# Altium PCB ZYNQ7020_AD9364_V2.PcbDoc (part 3 of 3)
Units mil, origin at the board's own origin, x right, y up, seen from the top; angles counter-clockwise.
Board outline 6000 x 4000 mil, 4 copper layers (Top Layer, Layer 1, Layer 2, Bottom Layer), stack 23.756 mil thick; 294 components, 275 nets, 1509 pads, 328 vias.
Unrouted connection lines stored in the file: 993.
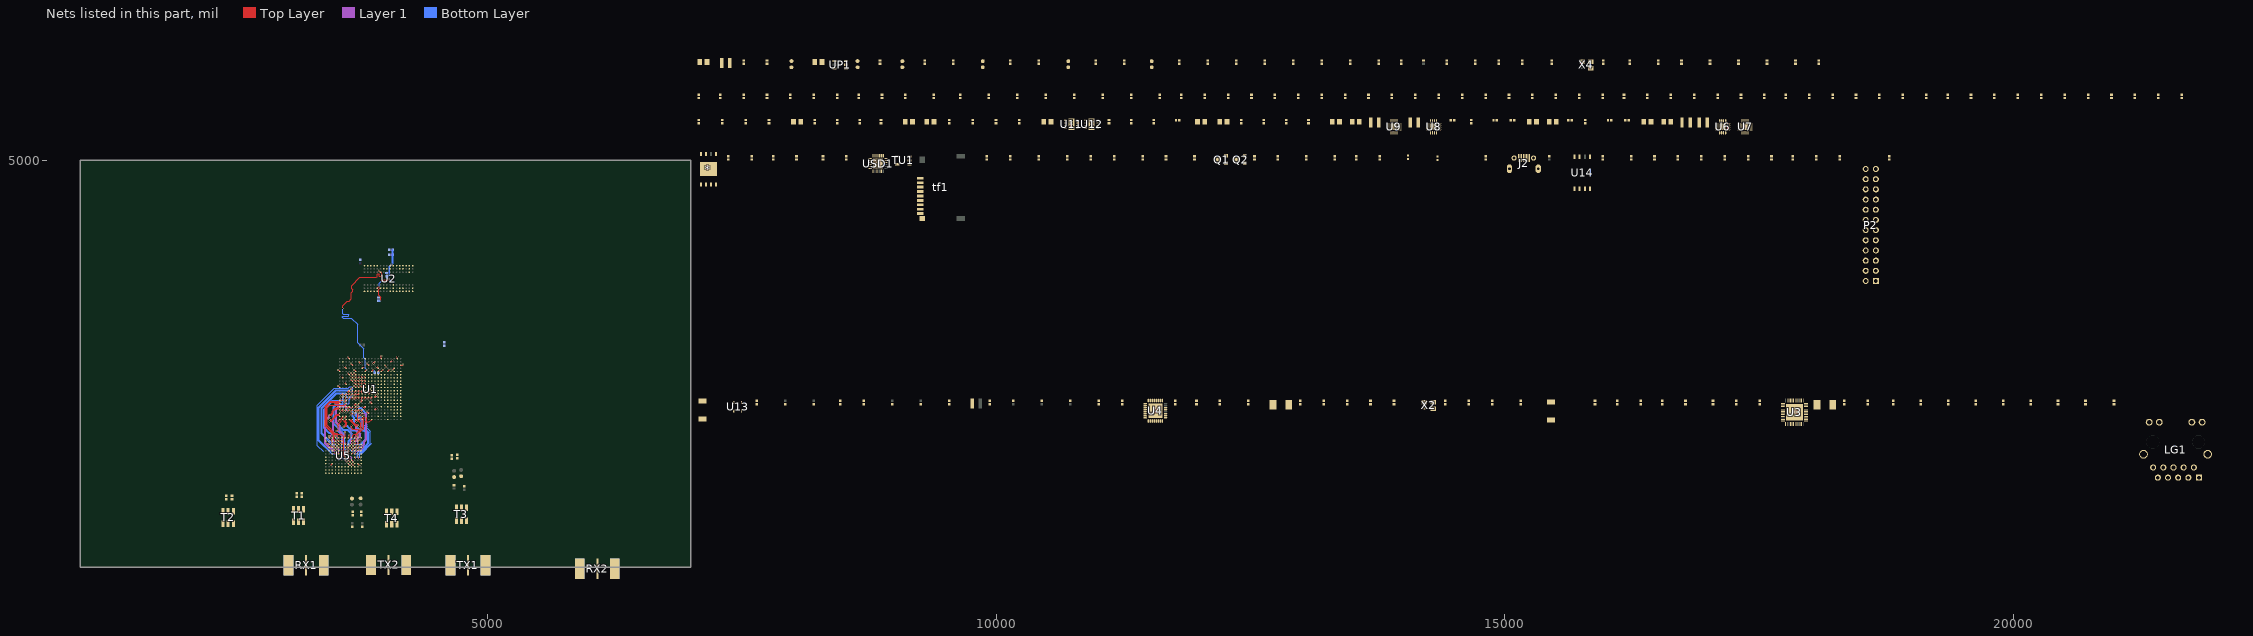
[diagram p4: the nets of this part, all layers, seen from the top]

## Via types
v1: diameter 17.72, hole 7.87, Top Layer to Bottom Layer, tented both sides, 194 vias
v2: diameter 16, hole 10, Top Layer to Bottom Layer, 118 vias
v3: diameter 19.68, hole 11.81, Top Layer to Bottom Layer, 16 vias

## Nets (pads, with @x,y where several pads share a name; then routed paths per layer and width w, separated by ;. In a path a pad name is that pad's centre, name@x,y a point inside that pad or via, vN(x,y) a via of type N, cw(c..) or ccw(c..) an arc to the next point about the centre after c; other vN are vias at no path point) (continued)
DDR3_VREF: C1.1 R4.1 R5.2 U1.H6 U1.P6 U2.H1 U2.M8 | length 538.6
  Top Layer w12: U2.M8@3920.99,3743.55 3920.99,3745.52 v2@3935.75,3760.28 ; U2.H1@4047,3965 v2(4062.72,3980.75)
  Top Layer w14: v2(3965.28,3820.32) 4017.44,3820.32 v2(4031.22,3834.1)
  Bottom Layer w12: v2(3938.7,3759.3) 3937.72,3760.28 3937.72,3790.79 v2@3966.26,3819.34
  Bottom Layer w14: 4051.89,3813.43 v2(4031.22,3834.1) 4011.54,3853.78 4036.14,3878.39 4036.14,3954.18 v2(4062.72,3980.75)
  Bottom Layer w20: C1.1@4010.02,3860.15 C1.1@4011,3859.17 ; v2(4062.72,3980.75) 4071.58,3989.61 4071.58,4074 R5.2@4071.58,4120
DDR3_WE: U1.M5 U2.L3 | length 1607.7
  Top Layer w6: v2(3580.33,3544.9) 3580.33,3570.49 3626.59,3616.75 3643.33,3616.75 3665.96,3639.39 3665.96,3699.43 3681.71,3715.18 3681.71,3728.96 3670.88,3739.79 3670.88,3770.3 3750.61,3850.02 3911.04,3850.02 3919.9,3858.88 3919.9,3879.55 3925.81,3885.45 3935.65,3885.45 3939.59,3881.52 3939.59,3863.8 3943.52,3859.86 3959.27,3859.86 3965.18,3865.77 3965.18,3891.36 3952.38,3904.16 3950.41,3904.16 v2(3936.63,3917.93) ; U1.M5@3801.92,2926.04 3803.84,2926.04 v2(3818.39,2940.6)
  Bottom Layer w6: v2@3581.32,3541.95 3581.32,3493.72 3586.24,3488.8 3637.42,3488.8 3642.34,3483.88 3642.34,3474.04 3637.42,3469.12 3581.32,3469.12 3577.38,3465.18 3577.38,3457.31 3585.25,3449.43 3666.95,3449.43 3726.99,3389.39 3726.99,3289 3726.86,3288.87 3726.86,3209.3 3786.9,3149.26 3786.9,3080.35 3786.65,3080.1 3786.65,3058.96 3803.63,3041.98 3803.63,3009.49 3803.38,3009.24 3803.38,2956.6 v2@3816.42,2943.55
EN_AGC: U1.W19 U5.G5 | length 541.8
  Top Layer w5: v1(3521.28,2341.28) 3523,2343 3525,2343 3536,2354 3536,2407 3567,2438 3567,2459 3582.88,2474.88 3582.88,2484.87 U1.W19@3583.06,2485.05 ; U5.G5@3604.5,2052.53 v1(3620.25,2036.78)
  Bottom Layer w5: v1(3521.28,2341.28) 3521.79,2341.79 3525.93,2341.79 3573,2294.72 3573,2084.03 v1(3620.25,2036.78)
ENABLE: U1.V15 U5.G6 | length 794.8
  Top Layer w5: U5.G6@3604.5,2084.02 3603.98,2084.02 3589,2099 3589,2288 3568.5,2308.5 3532.33,2308.5 3522.92,2317.92 3505.08,2317.92 3427,2396 3427,2568 3452,2593 3596.52,2593 U1.V15@3614.56,2611.04
ETH_MDC: U1.C10 U3.30
ETH_MDIO: R34.2 U1.C11 U3.31
ETH_RXCK: U1.B17 U3.19
ETH_RXCTL: R36.2 U1.D13 U3.13
ETH_RXD0: R41.1 U1.D11 U3.14
ETH_RXD1: R39.1 U1.A16 U3.16
ETH_RXD2: R43.1 U1.F15 U3.17
ETH_RXD3: R45.1 U1.A15 U3.18
ETH_TXCK: U1.A19 U3.22
ETH_TXCTL: U1.F14 U3.27
ETH_TXD0: U1.E14 U3.23
ETH_TXD1: U1.B18 U3.24
ETH_TXD2: U1.D10 U3.25
ETH_TXD3: U1.A17 U3.26
FB_CLK_N: RX22.2 U1.U17 U5.G10 | length 583.9
  Top Layer w5: U5.G10@3604.5,2210.01 v1(3620.25,2225.76) ; v1(3631.11,2532.64) 3631.11,2532.87 3646.59,2548.35 U1.U17@3646.59,2548.4
  Layer 1 w5: v1(3620.25,2225.76) 3598.09,2225.76 3593.76,2230.09 3593.76,2264.5 3588.26,2270 3588.26,2304.44 3556.07,2336.63 3556.07,2371.34 3556.07,2393 3521.26,2427.81 3521.26,2555.26 3549,2583 3604.28,2583 3615.22,2572.07 3615.22,2548.53 v1(3631.11,2532.64)
FB_CLK_P: U1.T16 U5.F10 | length 608.9
  Top Layer w5: v1(3557.36,2225.73) U5.F10@3573,2210.01 U5.F10@3573,2210.01 ; v1@3662.6,2564.38 U1.T16@3678.08,2579.87
  Layer 1 w5: v1(3557.36,2225.73) 3579.4,2225.73 3583.76,2230.09 3583.76,2260.36 3578.26,2265.86 3578.26,2300.3 3546.07,2332.49 3546.07,2388.86 3511.26,2423.67 3511.26,2559.4 3544.86,2593 3608.43,2593 3622.71,2578.72 3648.06,2578.72 v1(3662.6,2564.18)
FPGA_DONE: Q1.1 U1.R11 | length 21.9
  Top Layer w5: v1@3693.57,2721.54 U1.R11@3709.05,2737.02
  other v1: 3693.57,2721.36
FPGA_TCK: P2.10 U1.F9
FPGA_TDI: P2.8 U1.G6
FPGA_TDO: P2.7 U1.F6
FPGA_TMS: P2.9 U1.J6
GND: *.4 *.9 C1.2 C2.1 C3.1 C4.1 C5.1 C6.1 C7.1 C8.1 C9.1 C10.1 C11.1 C12.1 C13.1 C33.1 C34.1 C35.1 C36.1 C37.1 C38.1 C39.1 C41.1 C42.1 C43.1 C44.1 C45.1 C46.1 C49.1 C50.1 C51.1 C52.1 C53.1 C54.1 C55.1 C56.1 C57.1 C61.1 C62.1 C67.1 C68.1 C69.1 C70.1 C71.1 C72.1 C73.1 C74.1 C75.1 C76.1 C77.1 C78.1 C80.1 C81.2 C82.1 C83.1 C84.1 C85.1 C86.1 C87.1 C89.1 C90.1 C91.1 C92.1 C93.1 C94.1 C95.1 C96.1 C98.2 C99.2 C100.2 C101.2 C102.2 C103.2 C104.2 C105.2 C106.2 C107.2 C108.2 C109.1 C110.1 C111.2 C112.2 C113.1 C114.1 C115.1 C116.1 C117.2 C118.2 C119.1 C120.2 C121.1 C122.2 C123.2 C124.2 C125.2 C126.2 C127.1 C128.1 C129.2 C130.1 C131.1 C132.2 C133.2 C134.2 C135.2 C136.2 C137.2 C138.2 C139.2 C140.1 C141.2 J2.5 J2.6 J2.7 J2.8 J2.9 LG1.12 LG1.P10 LG1.SHIELD0 LG1.SHIELD1 P2.3 P2.5 P2.18 P2.19 P2.20 P2.21 P2.22 P2.23 P2.24 Q1.2 Q2.2 R1.2 R2.1 R5.1 R6.2 R11.2 R12.2 R17.2 R18.2 R26.2 R28.2 R36.1 R40.1 R44.2 R49.1 R51.1 R53.1 R54.2 R56.1 R62.1 R65.2 R69.2 RESET.1 RX6.2 RX7.2 RX8.2 RX13.2 RX14.2 RX15.2 tf1.6 tf1.10 TU1.2 U1.A8 U1.A18 U1.B1 U1.B11 U1.C4 U1.C9 U1.C14 U1.D17 U1.E10 U1.E20 U1.F3 U1.F7 U1.F10 U1.G10 U1.G12 U1.G16 U1.H7 U1.H9 U1.H11 U1.H13 U1.H19 U1.J2 U1.J8 U1.J10 U1.J12 U1.K5 U1.K7 U1.K10 U1.K11 U1.K13 U1.K15 U1.L8 U1.L9 U1.L12 U1.L18 U1.M1 U1.M7 U1.M9 U1.M10 U1.M11 U1.M13 U1.N4 U1.N8 U1.N10 U1.N12 U1.N14 U1.P7 U1.P9 U1.P11 U1.P13 U1.P17 U1.R8 U1.R12 U1.R20 U1.T3 U1.T7 U1.T13 U1.U6 U1.U16 U1.V9 U1.V19 U1.W2 U1.W12 U1.Y5 U1.Y15 U2.A9 U2.B1 U2.B3 U2.B9 U2.D1 U2.D8 U2.E1 U2.E2 U2.E8 U2.F9 U2.G1 U2.G8 U2.G9 U2.J2 U2.J8 U2.M1 U2.M9 U2.P1 U2.P9 U2.T1 U2.T9 U3.0 U3.47 U4.0 U6.6 U6.7 U6.8 U6.15 U6.16 U6.20 U7.6 U7.7 U7.8 U7.15 U7.16 U7.20 U8.6 U8.7 U8.8 U8.15 U8.16 U8.20 U9.6 U9.7 U9.8 U9.15 U9.16 U9.20 U13.1 U14.4 USD1.2 USD1.11 USD1.25 USR_BTN.1 X2.2 | length 880.4
  Top Layer w12: v1@3536.09,2941.48 U1.Y5@3551.57,2926 ; v1@3599.08,2815.49 U1.V9@3614.56,2800.01 ; v1@3630.58,2909.98 U1.U6@3646.06,2894.5 ; v1@3662.07,2878.49 U1.T7@3677.55,2863.01 ; v1@3662.07,3004.47 U1.T3@3677.55,2988.99 ; v1@3693.57,2846.99 U1.R8@3709.05,2831.51 ; v1@3725.06,2815.49 U1.P9@3740.54,2800.01 ; v1@3725.06,2878.49 U1.P7@3740.54,2863.01 ; v1@3756.56,2784 U1.N10@3772.04,2768.52 ; v1@3756.56,2846.99 U1.N8@3772.04,2831.51 ; U1.N4@3772.04,2957.49 v1@3787.51,2972.96 ; v1@3788.06,2721.54 U1.M11@3803.54,2737.02 ; v1@3788.06,2784 U1.M10@3803.54,2768.52 ; v1@3788.06,2815.49 U1.M9@3803.54,2800.01 ; v1@3788.06,2878.49 U1.M7@3803.54,2863.01 ; U1.K5@3866.53,2926 3866.53,2926.26 3882,2941.73 v1(3882,2942) ; v1(3882.14,3004.76) 3882.21,3004.76 3897.95,3020.49 U1.J2@3898.02,3020.49 ; U1.F3@3992.51,2988.99 v1@4007.98,2973.52 ; v1@4071.52,2942.01 U1.C4@4087,2957.49 ; v1(4118,3071) 4118.25,3070.75 4118.25,3052.23 U1.B1@4118.5,3051.98
  Top Layer w14: v1(3497,2609) 3498.01,2609 3500.01,2611 3551.53,2611 U1.Y15@3551.57,2611.04 ; v1@3568.11,2690.58 U1.W12@3583.06,2705.53 U1.W12@3583.59,2706.06 ; v1@3599.61,2469.11 U1.V19@3615.09,2484.59 ; v1(3631.36,2563.36) 3631.36,2564.36 3646.06,2579.07 U1.U16@3646.06,2579.54 ; v1@3661.06,2657.54 U1.T13@3677.55,2674.03 ; v1@3693.57,2690.05 U1.R12@3709.05,2705.53 ; U1.R20@3709.05,2453.56 3709.05,2443.19 3716.29,2435.95 v1(3716.29,2434.95) ; v1(3722.92,2532.64) 3723.93,2532.64 3739.34,2548.05 U1.P17@3740.54,2548.05 ; v1@3725.06,2721.54 U1.P11@3740.54,2737.02 ; v1(3726.36,2657.54) 3726.36,2658.55 3740.54,2672.73 U1.P13@3740.54,2674.03 ; v1@3756.56,2627.05 U1.N14@3772.04,2642.53 ; v1@3788.06,2658.55 U1.M13@3803.54,2674.03 ; v1(3819.55,2532.03) U1.L18@3835.03,2516.55 ; U1.L12@3835.03,2705.53 v1@3850.51,2721.01 ; v1@3851.05,2626.52 U1.K15@3866.53,2611.04 ; v1@3851.05,2658.55 U1.K13@3866.53,2674.03 ; U1.J12@3898.02,2705.53 v1@3913.5,2721.01
  Bottom Layer w12: v1(3882,2942) 3882,2940.45 3889.19,2933.26 3889.19,2918.81 R2.1@3895,2913
  other v1: 3599.61,2468.1 3756.56,2626.04 3850.04,2626.52 3661.05,2657.54 3788.06,2657.54 3851.05,2657.54 3568.11,2690.4 3692,2691 3788.06,2721.28 3726,2722 3850.51,2722.02 3913.5,2722.02 3756.3,2784 3787.8,2784 3598.82,2815.49 3724.8,2815.49 3787.8,2815.49 3693.31,2846.99 3756.3,2846.99 3661.81,2878.49 3724.8,2878.49 3787.8,2878.49 3630.32,2909.98 3535.83,2941.48 4071.52,2941.75 3787.51,2973.22 4006,2973 3661.81,3004.47
NetC6_2: C6.2 U6.9
NetC7_2: C7.2 U7.9
NetC11_2: C11.2 U8.9
NetC13_2: C13.2 U9.9
NetC19_1: C19.1 R21.2 R24.1 U11.3
NetC24_1: C24.1 R22.2 R25.1 U12.3
NetC27_2: C27.2 U11.6
NetC28_2: C28.2 U12.6
NetC111_1: C111.1 C112.1 LG1.P1
NetC117_1: C117.1 U3.43 X1.1
NetC118_1: C118.1 U3.42 X1.2
NetC119_2: C119.2 R28.1 R29.1 U1.E11
NetC122_1: C122.1 U4.26 X3.1
NetC123_1: C123.1 U4.25 X3.2
NetC129_1: C129.1 U4.20
NetC135_1: C135.1 C136.1 R64.1
NetC142_1: C142.1 R73.2
NetC145_2: C145.2 R74.1
NetC146_2: C146.2 R73.1 U5.G2 U5.G3
NetC150_2: C150.2 C152.1 U5.M12
NetC151_2: C151.2 R74.2 U5.A11 U5.B11
NetC152_2: C152.2 X4.3
NetCP2_2: CP2.2 RP1.1 RP2.2 UP1.6
NetDONE_2: DONE.2 R61.2
NetL1_1: L1.1 U6.1 U6.2 U6.3
NetL2_1: L2.1 U7.1 U7.2 U7.3
NetL3_1: L3.1 U8.1 U8.2 U8.3
NetL4_1: L4.1 U9.1 U9.2 U9.3
NetLG1_11: LG1.11 R32.2
NetLG1_13: LG1.13 R31.2
NetLP1_1: LP1.1 UP1.3
NetP2_2: P2.2 R52.1 R54.1
NetP2_4: P2.4 R48.2 R50.1
NetQ1_3: Q1.3 R61.1
NetQ2_3: Q2.3 R60.1
NetR2_2: R2.2 U1.H5 | length 58.3
  Top Layer w6: U1.H5@3929.52,2926 3929.52,2926.26 3945,2941.74 v1(3945,2942)
  Bottom Layer w6: R2.2@3928.46,2913 3937.28,2921.81 3937.28,2931.11 3945,2938.83 v1(3945,2942)
NetR3_2: R3.2 U1.G5 | length 22.6
  Top Layer w6: U1.G5@3961.02,2926 v1(3977,2942)
NetR6_1: R6.1 U2.L8 | length 161.3
  Top Layer w6: U2.L8@3952.36,3743.64 3949.41,3743.64 3937.6,3731.83 3937.6,3673.76 3956.3,3655.05 v2(3956.3,3621.59)
  Bottom Layer w6: R6.1@3930.71,3619.62 v2@3954.33,3619.62
NetR9_2: R9.2 R11.1 U6.5
NetR10_2: R10.2 R12.1 U7.5
NetR14_2: R14.2 R17.1 U8.5
NetR15_2: R15.2 U9.4
NetR16_2: R16.2 R18.1 U9.5
NetR26_1: R26.1 U3.39
NetR27_1: R27.1 U3.32
NetR30_2: R30.2 U1.B10
NetR37_2: R37.2 X2.3
NetR38_2: R38.2 U3.20
NetR42_2: R42.2 U4.1
NetR44_1: R44.1 U4.24
NetR55_2: R55.2 U1.R10 | length 21.9
  Top Layer w12: v1@3693.57,2784 U1.R10@3709.05,2768.52
  other v1: 3693.31,2784
NetR57_2: R57.2 U1.L6
NetR60_2: R60.2 USR_LED.2
NetR62_2: R62.2 USD1.24
NetR63_2: R63.2 tf1.3 USD1.20
NetR67_2: R67.2 TU1.1
NetR68_1: R68.1 TU1.3
NetR70_1: R70.1 tf1.9
NetR72_1: R72.1 USD1.9
NetR75_1: R75.1 U5.L4 | length 22.3
  Top Layer w5: U5.L4@3730.48,2021.03 v1(3746.23,2005.28)
NetRESET_2: RESET.2 U13.3
NetRX1_1: RX1.1 T1.3
NetRX2_1: RX2.1 T2.3
NetT3_3: T3.3 TX1.1
NetT4_3: T4.3 TX2.1
Nettf1_1: tf1.1 USD1.23
Nettf1_2: tf1.2 USD1.22
Nettf1_5: tf1.5 USD1.19
Nettf1_7: tf1.7 USD1.18
Nettf1_8: tf1.8 USD1.16
OTG_CLK: R42.1 U1.A11
OTG_DATA0: U1.A14 U4.3
OTG_DATA1: U1.D15 U4.4
OTG_DATA2: U1.A12 U4.5
OTG_DATA3: U1.F12 U4.6
OTG_DATA4: U1.C16 U4.7
OTG_DATA5: U1.A10 U4.9
OTG_DATA6: U1.E13 U4.10
OTG_DATA7: U1.C18 U4.13
OTG_DIR: U1.C13 U4.31
OTG_NXT: U1.E16 U4.2
OTG_RESETN: C121.2 R33.1 U1.D16 U4.27
OTG_STP: U1.C15 U4.29
PG_1V0: R7.2 U6.4 U7.13
PG_1V5: R13.2 U8.4 U9.13
PG_1V8: R8.2 U7.4 U8.13
PHY_AD0/LED0: R31.1 R46.2 U3.35
PHY_AD1/LED1: R32.1 R40.2 U3.34
PHY_MDI0_N: LG1.P3 U3.2
PHY_MDI0_P: LG1.P2 U3.1
PHY_MDI1_N: LG1.P7 U3.5
PHY_MDI1_P: LG1.P4 U3.4
PHY_MDI2_N: LG1.P6 U3.8
PHY_MDI2_P: LG1.P5 U3.7
PHY_MDI3_N: LG1.P9 U3.11
PHY_MDI3_P: LG1.P8 U3.10
PMEB: R35.2 U3.33
PS_CLK_500: R37.1 U1.E7
PS_MIO7: R56.2 U1.D8
PS_MIO8: R47.2 U1.D5
PS_PRO_B: U1.C7 U3.29 U13.2
QSPI_CS: *.1 R59.1 U1.A7 U14.1
QSPI_D0: *.5 R49.2 U1.B8 U14.5
QSPI_D1: *.2 R51.2 U1.D6 U14.2
QSPI_D2: *.3 R52.2 U1.B7 U14.3
QSPI_D3: *.7 R50.2 U1.A6 U14.7
QSPI_SCK: R53.2 R58.2 U1.A5
REG_OUT: L6.1 U3.48
RFGND: C14.2 C15.2 C17.1 C18.1 C20.1 C21.1 C22.1 C23.1 C25.1 C26.1 C27.1 C28.1 C58.2 C59.1 C60.2 C63.1 C142.2 C143.1 C144.1 C145.1 C146.1 C150.1 C151.1 C162.2 C165.2 C166.2 C168.2 C169.2 C170.2 C171.2 C172.2 C173.2 C174.2 C175.2 C176.2 C177.2 CP1.1 CP3.1 R24.2 R25.2 R75.2 RP1.2 RX1.2 RX1.3 RX1.4 RX1.5 RX2.2 RX2.3 RX2.4 RX2.5 RX5.1 RX6.1 RX7.1 RX8.1 RX10.1 RX13.1 RX14.1 RX15.1 RX22.1 T1.1 T1.2 T1.5 T2.1 T2.2 T2.5 T3.1 T3.2 T3.5 T4.1 T4.2 T4.5 TX1.2 TX1.3 TX1.4 TX1.5 TX2.2 TX2.3 TX2.4 TX2.5 U5.A1 U5.A2 U5.A4 U5.A5 U5.A6 U5.A12 U5.B1 U5.B2 U5.B12 U5.C1 U5.C2 U5.C7 U5.C8 U5.C9 U5.C10 U5.C11 U5.C12 U5.D1 U5.D12 U5.E1 U5.F1 U5.F3 U5.F7 U5.F9 U5.F11 U5.G1 U5.G12 U5.H2 U5.H3 U5.H5 U5.H6 U5.H7 U5.H10 U5.J2 U5.K1 U5.K2 U5.K12 U5.L1 U5.L2 U5.L3 U5.L7 U5.L8 U5.L9 U5.L10 U5.L11 U5.L12 U5.M4 U5.M5 U5.M6 U11.0 U11.4 U12.0 U12.4 UP1.2 X4.2 | length 435.1
  Top Layer w8: U5.C10@3478.51,2210.01 U5.C11@3478.51,2241.5
  Top Layer w12: U5.B12@3447.02,2273 v1@3447.02,2292.27 ; v1(3462.64,2257.99) 3462.64,2257.68 3478.33,2241.99 U5.C11@3478.51,2241.99 ; v1(3463,2195) 3463,2194.51 3478.51,2179 U5.C9@3478.51,2178.51 ; U5.C12@3478.51,2273 3478.58,2273.07 3478.58,2293.01 v1(3478.64,2293.08) ; v1(3509.36,2292.92) 3509.68,2292.6 3509.68,2273.33 U5.D12@3509.76,2273.25 ; v1(3557.25,2194.26) U5.F9@3573,2178.51 ; v1(3557.36,2257.25) v1(3557.36,2257.25) 3573,2241.55 U5.F11@3573,2241.5 ; U5.G12@3604.5,2273 3605,2273.5 v1(3605,2331) ; U5.H5@3635.99,2052.53 v1(3651.74,2036.78) ; U5.H6@3635.99,2084.02 v1(3651.74,2068.27) ; U5.H7@3635.99,2115.52 3635.99,2116.06 3650.64,2130.71 v1(3650.64,2131.27) ; v1(3698.79,2294.21) 3698.89,2294.11 3698.89,2273.1 U5.K12@3698.99,2273 ; U5.L12@3730.08,2273.6 3730.23,2273.6 3730.56,2273.92 3730.56,2295.28 v1(3730.64,2295.36) ; U5.L8@3730.48,2147.01 v1(3746.12,2162.64) ; U5.L9@3730.48,2178.51 v1(3746.23,2194.26) ; U5.L10@3730.48,2210.01 v1(3746.23,2225.76) ; U5.L11@3730.48,2241.5 3742.98,2254 v1(3745,2254)
  other v1: 3446.69,2292.6
  other v3: 10727.2,5316.61 10752.8,5316.61 10927.2,5316.61 10952.8,5316.61 10727.2,5342.2 10752.8,5342.2 10927.2,5342.2 10952.8,5342.2 10727.2,5367.8 10752.8,5367.8 10927.2,5367.8 10952.8,5367.8 10727.2,5393.39 10752.8,5393.39 10927.2,5393.39 10952.8,5393.39
RX1A_N: C16.2 U5.M2
RX1A_P: C30.2 U5.M1
RX1AN_N: C16.1 T1.6
RX1AN_P: C30.1 T1.4
RX1B_N: C29.2 U5.J1
RX1B_P: C31.2 U5.H1
RX1BN_N: C29.1 T2.6
RX1BN_P: C31.1 T2.4
RX_D0_N: U1.P20 U5.K11 | length 310.8
  Top Layer w5: U5.K11@3698.99,2241.5 3714.15,2256.66 3714.15,2300.59 3745.77,2332.21 3752.08,2332.21 3785.43,2365.56 3785.43,2459.11 3777.59,2466.95 3766.49,2466.95 3760.57,2461.03 3750.39,2461.03 3742.92,2453.56 U1.P20@3740.54,2453.56
RX_D0_P: U1.N20 U5.J12 | length 239.9
  Top Layer w5: U5.J12@3667.49,2273 3680.82,2286.33 3680.82,2297.95 3692.43,2309.56 3708.98,2309.56 3741.63,2342.21 3747.94,2342.21 3775.43,2369.7 U1.N20@3775.43,2454.77
RX_D1_N: U1.W20 U5.K10 | length 402.3
  Top Layer w5: U1.W20@3583.06,2453.56 3593.81,2442.81 3593.81,2432.04 3608.65,2417.2 3608.65,2398.93 3605.72,2396 3599.29,2396 3593.29,2402 v1(3590,2402) ; U5.K10@3698.99,2210.01 v1(3714.74,2225.76)
  Bottom Layer w5: v1(3590,2402) 3593.29,2402 3599.29,2396 3624.14,2396 3642.07,2378.07 3668.54,2351.6 3706.33,2351.6 3736.5,2321.43 3736.5,2312.94 3746,2303.44 3746,2281.95 3714.74,2250.69 v1(3714.74,2225.76)
RX_D1_P: U1.V20 U5.J11 | length 372.9
  Top Layer w5: v1(3590,2380) 3593.29,2380 3599.29,2386 3609.86,2386 3618.65,2394.79 3618.65,2421.35 3603.81,2436.19 3603.81,2442.81 U1.V20@3614.56,2453.56 ; U5.J11@3667.49,2241.5 3668.43,2241.5 3683.19,2256.26 v1(3684.13,2256.26)
  Bottom Layer w5: v1(3590,2380) 3593.29,2380 3599.29,2386 3620,2386 3664.4,2341.6 3702.19,2341.6 3726.5,2317.29 3726.5,2312.94 3714.15,2300.59 3714.15,2286.29 v1(3684.13,2256.26)
RX_D2_N: U1.U20 U5.K9 | length 403.1
  Top Layer w5: U1.U20@3646.06,2453.56 3647.74,2451.88 3653.02,2451.88 3656.81,2448.1 3656.81,2439.81 3688.26,2408.36 3688.36,2408.36 3705.04,2391.68 3726.57,2391.68 3732.89,2385.36 v1(3735.86,2385.36) ; U5.K9@3698.99,2177.98 3699.44,2177.98 3714.73,2193.28 v1(3714.73,2193.36)
  Layer 1 w5: v1(3714.73,2193.36) 3730.75,2209.37 3730.75,2246.53 3729.64,2247.64 3729.64,2263.36 3736.28,2270 3741.14,2270 3760.5,2289.36 3760.5,2313.14 3718.82,2354.82 3718.82,2381.26 3717.53,2382.55 3717.53,2388.75 3720.46,2391.68 3726.57,2391.68 3732.89,2385.36 v1(3735.86,2385.36)
RX_D2_P: U1.T20 U5.J10 | length 386.1
  Top Layer w5: U5.J10@3667.49,2210.01 3683.24,2225.76 v1(3683.34,2225.76) ; U1.T20@3677.55,2453.56 3675.87,2451.88 3670.59,2451.88 3666.81,2448.1 3666.81,2443.95 3692.4,2418.36 3692.5,2418.36 3709.18,2401.68 3724.71,2401.68 3731.03,2408 v1(3734,2408)
  Layer 1 w5: v1(3683.34,2225.76) 3698.7,2241.12 3717.35,2241.12 3719.68,2243.45 3719.64,2243.5 3719.64,2267.5 3732.14,2280 3737,2280 3750.5,2293.5 3750.5,2309 3708.82,2350.68 3708.82,2376.26 3707.53,2377.55 3707.53,2392.89 3716.32,2401.68 3724.71,2401.68 3731.03,2408 v1(3734,2408)
RX_D3_N: U1.R18 U5.K8 | length 517.2
  Top Layer w5: v1(3693.6,2500.64) U1.R18@3709.56,2516.6 ; U5.K8@3698.99,2147.01 3699.1,2147.01 v1(3714.74,2162.64)
  Bottom Layer w5: v1(3693.6,2500.64) 3693.6,2497.95 3687,2491.35 3687,2487.21 3700.93,2473.28 3700.93,2410.21 3701.07,2410.07 3704.61,2406.54 3717.57,2393.57 3720.5,2390.64 3720.5,2377.64 3729.07,2369.07 3760.5,2369.07 3776.04,2353.54 3787.59,2353.54 3810.62,2330.51 3810.62,2299.37 3814,2295.99 3814,2254.86 3774.52,2215.37 3774.52,2214.92 3771.59,2212 3771.75,2211.83 3771.75,2198.06 3752.59,2178.9 3731,2178.9 v1(3714.74,2162.64)
RX_D3_P: U1.T17 U5.J9 | length 552
  Top Layer w5: v1(3662.6,2532.64) 3662.6,2532.87 3678.08,2548.35 U1.T17@3678.08,2548.4 ; U5.J9@3667.49,2178.51 3683.24,2194.25 v1(3683.35,2194.25)
  Bottom Layer w5: v1@3662.6,2532.4 v1(3662.6,2532.64) 3677.86,2517.38 3677.86,2496.35 3677,2495.5 3677,2483.07 3690.93,2469.14 3690.93,2406.07 3701.07,2395.93 3710.5,2386.5 3710.5,2373.5 3722,2362 3724.93,2359.07 3756.36,2359.07 3771.89,2343.54 3783.45,2343.54 3800.62,2326.37 3800.62,2295.23 3804,2291.85 3804,2259 3764.52,2219.52 3764.52,2219.07 3761.59,2216.14 3761.59,2213.87 3757.33,2209.62 3698.71,2209.62 v1(3683.35,2194.25)
RX_D4_N: U1.P19 U5.K7 | length 543.5
  Top Layer w5: U5.K7@3698.99,2115.52 v1(3714.74,2131.27) ; U1.P19@3740.54,2485.3 3756.34,2501.1 3759.14,2501.1 v1(3759.29,2501.24)
  Layer 1 w5: v1(3714.74,2131.27) 3730.27,2146.8 3752.01,2146.8 3788.75,2183.55 3788.75,2200.42 3796.5,2208.16 3796.5,2237 3817,2257.5 3817,2502.14 3814.07,2505.07 3809.07,2510.07 3802.69,2516.45 3774.49,2516.45 v1(3759.29,2501.24)
RX_D4_P: U1.N18 U5.J8 | length 485.8
  Top Layer w5: U5.J8@3667.49,2147.01 3683.24,2162.76 v1(3683.35,2162.76) ; U1.N18@3772.29,2516.55 v1@3787.75,2501.09
  Layer 1 w5: v1(3683.35,2162.76) 3698.58,2178 3752.19,2178 3786.5,2212.31 3786.5,2241.14 3807,2261.65 3807,2498 3802,2503 3790.16,2503 v1(3788.25,2501.09)
  Bottom Layer w5: v1(3788.25,2501.09) v1@3788.25,2503.18
RX_D5_N: U1.R17 U5.J7 | length 626.3
  Top Layer w5: U5.J7@3667.49,2115.52 v1(3683.24,2131.27) ; v1(3695.82,2533.92) 3695.82,2534.37 U1.R17@3709.58,2548.13
  Bottom Layer w5: v1(3683.24,2131.27) 3698.6,2115.91 3721.1,2115.91 3730.1,2124.91 3730.1,2133.84 3733.03,2136.77 3757.91,2136.77 3820.5,2199.36 3820.5,2203.5 3837.93,2220.93 3837.93,2330.07 3771,2397 3771,2445 3744,2472 3718.96,2497.04 3718.96,2510.94 3695.97,2533.92 v1(3695.82,2533.92)
RX_D5_P: U1.R16 U5.H8 | length 673.7
  Top Layer w5: U5.H8@3635.99,2147.01 3650.64,2161.66 v1(3650.64,2162.76) ; v1@3694.1,2564.41 U1.R16@3709.58,2579.89
  Bottom Layer w5: v1(3650.64,2162.76) 3666.63,2146.77 3753.77,2146.77 3810.5,2203.5 3810.5,2207.64 3827.93,2225.07 3827.93,2325.93 3761,2392.86 3761,2440.86 3708.96,2492.9 3708.96,2502.68 3709.46,2503.18 3709.46,2507 3700.46,2516 3692.02,2516 3680.46,2527.56 3680.46,2547.8 3694.1,2561.43 v1(3694.1,2564.24)
RX_FRAME_N: U1.V13 U5.G7 | length 706.1
  Top Layer w5: v1@3599.08,2658.37 U1.V13@3614.56,2673.85 ; U5.G7@3604.5,2115.52 3604.5,2116.52 3619.25,2131.27 v1@3620.25,2131.27
  Bottom Layer w5: v1(3599.08,2658.2) 3596.64,2655.76 3596.64,2645.33 3581.75,2630.44 3581.75,2617.75 3572,2608 3517.72,2608 3486.62,2576.9 3486.62,2410.38 3565.93,2331.07 3573,2324 3593,2304 3593,2155.24 3606.22,2142.02 3606.55,2142.02 3616.06,2132.52 v1(3619.5,2132.52)
RX_FRAME_P: U1.U13 U5.G8 | length 708
  Top Layer w5: U5.G8@3604.5,2147.01 3604.5,2147.55 3619.93,2162.98 v1(3619.93,2163.52) ; v1(3630.33,2658.2) v1(3630.33,2658.2) 3645.94,2673.85 U1.U13@3646.06,2673.85
  Bottom Layer w5: v1(3619.93,2163.52) 3617.8,2163.52 3608.33,2154.06 3603,2159.39 3603,2308.14 3496.62,2414.52 3496.62,2572.76 3521.86,2598 3576.14,2598 3588.83,2610.68 3605.44,2610.68 3615.22,2620.46 3615.22,2643.08 v1(3630.33,2658.2)
SD_CD: R70.2 R71.1 U1.B14
SD_CLK: R72.2 U1.D14
SD_CMD: U1.C17 USD1.4
SD_D0: U1.E12 USD1.6
SD_D1: U1.A9 USD1.7
SD_D2: U1.F13 USD1.1
SD_D3: U1.B15 USD1.3
SPI_CLK: U1.P18 U5.J5 | length 699.5
  Top Layer w5: U5.J5@3667.49,2052.53 v1(3683.24,2036.78) ; v1@3670,2390 3670,2369 3678.41,2360.59 3746.04,2360.59 3760.36,2374.91 3760.36,2416.09 3744.09,2432.36 3742.81,2432.36 3727.15,2448.01 3727.15,2502.98 U1.P18@3740.54,2516.37
  Layer 1 w5: v1@3666,2395 3666,2279.73 3657.72,2271.44 3657.72,2220.72 3647,2210 3641,2210 3636,2205 3636,2187.64 3635.28,2186.92 3635.28,2155.42 3636,2154.7 3636,2141 3635.28,2140.28 3635.28,2108.72 3668.01,2075.99 3668.01,2052.01 v1(3683.24,2036.78)
  other v1: 3669,2394
SPI_DI: U1.P15 U5.J4 | length 279.7
  Top Layer w5: U5.J4@3667.49,2021.03 v1(3683.24,2005.28) ; v1@3725.06,2595.38 U1.P15@3740.54,2610.86
  Bottom Layer w5: v1(3725.06,2595.21) 3747.62,2572.64 3757.09,2572.64 3817,2512.73 3817,2409 3821,2405
SPI_DO: U1.P16 U5.L6 | length 482.5
  Top Layer w5: v1(3725.59,2563.64) 3725.59,2564.11 3741.07,2579.6 U1.P16@3741.07,2579.89 ; U5.L6@3730.48,2084.02 v1(3746.23,2068.27)
  Bottom Layer w5: v1(3725.59,2563.64) 3753.36,2563.64 3808,2509 3808,2402 3821,2389 ; v1(3746.23,2068.27) 3746.36,2068.41 3746.36,2106.64 3757.73,2118 3765.73,2118 3868,2220.27
SPI_ENB: U1.N17 U5.K6 | length 625.1
  Top Layer w5: U5.K6@3698.99,2084.02 v1(3714.74,2068.27) ; v1@3756.56,2532.39 U1.N17@3772.04,2547.87
  Bottom Layer w5: v1(3714.74,2068.27) 3714.74,2070.88 3725,2081.14 3725,2098 3754,2127 3762,2127 3852.5,2217.5 3852.5,2338.5 3793,2398 3791,2398 3780,2409 3780,2449 3762,2467 3762,2473 3740,2495 3740,2515.66 v1(3756.56,2532.22) v1@3756.56,2531.56
TEST/ENABLE: RX5.2 U5.C4 | length 22.3
  Top Layer w5: v1(3462.76,2005.28) U5.C4@3478.51,2021.03
TX1A_N: C48.1 L9.2 U5.M8
TX1A_P: C40.1 L8.2 U5.M7
TX1B_N: C47.1 L7.2 U5.M10
TX1B_P: C32.1 L5.2 U5.M9
TX1BN_N: C47.2 C48.2 T3.6 T4.6
TX1BN_P: C32.2 C40.2 T3.4 T4.4
TX_D0_N: U1.T10 U5.E7 | length 1015.2
  Top Layer w5: v1(3524.64,2131.91) 3541.04,2115.51 U5.E7@3541.51,2115.52 ; v1@3662.07,2753.04 3662.16,2753.04 3677.55,2768.43 U1.T10@3677.55,2768.52
  Bottom Layer w5: v1(3524.64,2131.91) 3508.5,2115.77 3472.75,2115.77 3341.83,2246.69 3341.83,2574.69 3513.86,2746.72 3642.33,2746.72 3646.94,2742.11 3651.1,2742.11 3661.85,2752.86 v1(3662.07,2752.86)
TX_D0_P: U1.T11 U5.F8 | length 1003.5
  Top Layer w5: v1(3557,2161.64) 3557.68,2161.64 3572.32,2147.01 U5.F8@3573,2147.01 ; v1(3661.64,2721.36) 3661.77,2721.36 3677.43,2737.02 U1.T11@3677.55,2737.02
  Bottom Layer w5: v1(3557,2161.64) 3542.64,2147.28 3518.3,2147.28 3518.12,2147.11 3455.55,2147.11 3351.83,2250.83 3351.83,2570.54 3518,2736.72 3638.19,2736.72 3642.8,2732.11 3651.1,2732.11 3661.64,2721.57 v1(3661.64,2721.36)
TX_D1_N: U1.Y17 U5.D7 | length 698.7
  Top Layer w5: v1(3463,2481) 3464.85,2482.85 3464.85,2492.28 3486.78,2514.21 3486.78,2532.77 3512.81,2558.79 3540.83,2558.79 U1.Y17@3551.57,2548.05 ; v1(3492.67,2131.12) 3494.4,2131.12 U5.D7@3510.01,2115.52
  Layer 1 w5: v1(3463,2481) 3461.15,2479.15 3451.72,2479.15 3415.06,2442.49 3415.06,2219.5 3456.56,2178 3531,2178 3540,2169 3540,2125.55 3531,2116.55 3507.24,2116.55 v1(3492.67,2131.12)
TX_D1_P: U1.Y16 U5.E8 | length 632.1
  Top Layer w5: v1(3448,2499) 3449.85,2500.85 3459.28,2500.85 3476.78,2518.35 3476.78,2536.91 3508.67,2568.79 3540.83,2568.79 U1.Y16@3551.57,2579.54 ; v1(3524.64,2162.64) 3525.88,2162.64 U5.E8@3541.51,2147.01
  Layer 1 w5: v1(3448,2499) 3446.15,2497.15 3446.15,2487.72 3405.06,2446.63 3405.06,2215.36 3452.42,2168 3476.89,2168 3479.82,2165.07 3479.82,2156.1 3488.82,2147.11 3509.11,2147.11 v1(3524.64,2162.64)
TX_D2_N: U1.U12 U5.D8 | length 838
  Top Layer w5: v1(3495.18,2162.47) 3499.18,2158.47 3499.18,2158.16 3510.01,2147.32 U5.D8@3510.01,2147.01 ; v1@3630.58,2689.87 U1.U12@3646.06,2705.35
  Bottom Layer w5: v1(3495.18,2162.47) 3478.95,2178.7 3478.95,2202.48 3367.79,2313.64 3367.79,2567.3 3516.48,2716 3607.1,2716 3630.58,2692.52 v1(3630.58,2689.7)
TX_D2_P: U1.T12 U5.E9 | length 858
  Top Layer w5: v1@3525.76,2194.26 3530.01,2190.01 3530.01,2189.7 3538.41,2181.29 3538.73,2181.29 U5.E9@3541.51,2178.51 ; v1(3661.28,2689.7) 3661.5,2689.7 3677.16,2705.35 U1.T12@3677.55,2705.35
  Bottom Layer w5: v1@3525.76,2194.26 3524.76,2194.26 3509.4,2209.62 3485.95,2209.62 3377.79,2317.79 3377.79,2563.16 3520.63,2706 3602.96,2706 3613.58,2695.38 3613.58,2684.97 3624.22,2674.34 3643.4,2674.34 3658.76,2689.7 v1(3661.28,2689.7)
  other v1: 3525.51,2193.51
TX_D3_N: U1.Y19 U5.D9 | length 448.4
  Top Layer w5: v1(3451,2432) 3453.79,2432 3460.29,2438.5 3470.36,2438.5 3527.66,2495.8 3540.82,2495.8 U1.Y19@3551.57,2485.05 ; v1@3494.31,2194.25 U5.D9@3510.01,2178.51
  Layer 1 w5: v1(3451,2432) 3453.79,2432 3460.29,2438.5 3466.22,2438.5 3480.96,2423.76 3480.96,2313.54 3475.86,2308.44 3472.28,2308.44 3463.28,2299.44 3463.28,2286.72 3472.28,2277.72 3478.07,2277.72 3481,2274.79 3481,2240.45 3480.01,2239.46 3480.01,2208.56 v1(3494.31,2194.26)
TX_D3_P: U1.Y18 U5.E10 | length 434
  Top Layer w5: v1(3451,2455) 3453.79,2455 3460.29,2448.5 3466.22,2448.5 3523.52,2505.8 3540.82,2505.8 U1.Y18@3551.57,2516.55 ; v1(3525.76,2225.76) U5.E10@3541.51,2210.01
  Layer 1 w5: v1(3451,2455) 3453.79,2455 3460.29,2448.5 3470.36,2448.5 3490.96,2427.9 3490.96,2311.18 3494,2308.14 3494,2280.72 3491,2277.72 3491,2243.38 3493.93,2240.45 3511.07,2240.45 v1(3525.76,2225.76)
TX_D4_N: U1.W13 U5.D10 | length 675.4
  Top Layer w5: v1(3495.37,2225.09) 3495.37,2224.87 3510.01,2210.23 U5.D10@3510.01,2210.01 ; v1@3567.58,2658.37 U1.W13@3583.06,2673.85
  Bottom Layer w5: v1(3495.37,2225.09) 3494,2226.46 3494,2299.28 3500.92,2306.21 3500.92,2312.76 3492.67,2321.02 3441.84,2321.02 3393,2369.86 3393,2554.83 3480.01,2641.84 3563.65,2641.84 3567.23,2645.41 3567.23,2657.84 v1(3567.58,2658.2)
TX_D4_P: U1.V12 U5.E11 | length 686.8
  Top Layer w5: v1@3526.75,2256.26 3527.26,2256.26 3541.51,2242 U5.E11@3541.51,2241.5 ; v1(3598.22,2689.02) 3598.22,2689.19 U1.V12@3614.56,2705.53
  Bottom Layer w5: v1(3526.01,2258) 3526.01,2297.99 3510.92,2313.08 3510.92,2316.91 3496.81,2331.02 3445.98,2331.02 3403,2374 3403,2550.69 3484.15,2631.84 3567.79,2631.84 3582.94,2646.98 3582.94,2664.56 3582.08,2665.42 3582.08,2672.87 v1(3598.22,2689.02)
TX_D5_N: U1.Y14 U5.D11 | length 554
  Top Layer w5: U5.D11@3510.01,2241.5 3494,2257.51 3494,2299.44 3408,2385.44 3408,2585.73 3456.81,2634.54 3544.25,2634.54 3551.57,2641.86 U1.Y14@3551.57,2642.53
TX_D5_P: U1.W14 U5.E12 | length 559.7
  Top Layer w5: U5.E12@3541.51,2273 3527.75,2286.76 3527.75,2296.25 3515.72,2308.28 3499.3,2308.28 3418,2389.58 3418,2581.59 3460.95,2624.54 3552.69,2624.54 3569,2640.85 3581.38,2640.85 U1.W14@3583.06,2642.53
TX_FRAME_N: RX10.2 U1.W16 U5.H9 | length 579.8
  Top Layer w5: v1@3568.11,2564.41 U1.W16@3583.59,2579.89 ; U5.H9@3635.99,2178.51 3635.99,2178.7 3651.36,2194.07 v1(3651.36,2194.26)
  Bottom Layer w5: v1(3568.11,2564.24) 3566.81,2565.54 3566.81,2576.07 3563.88,2579 3546.94,2579 3520.93,2552.99 3520.93,2423.93 3588,2356.86 3631.28,2356.86 3673.93,2314.21 3673.93,2268.27 3645.61,2239.95 3645.61,2214 3641,2209.4 3641,2204.31 3651.05,2194.26 v1(3651.36,2194.26)
TX_FRAME_P: U1.V16 U5.G9 | length 627.1
  Top Layer w5: v1@3599.61,2564.41 U1.V16@3615.09,2579.89 ; U5.G9@3604.5,2178.51 3604.83,2178.51 3620.32,2194 3620.64,2194 v1(3620.64,2193.64)
  Bottom Layer w5: v1(3599.61,2564.24) 3597.1,2564.24 3572.34,2589 3542.8,2589 3510.93,2557.13 3510.93,2419.79 3583.86,2346.86 3627.14,2346.86 3663.93,2310.07 3663.93,2272.41 3635.61,2244.09 3635.61,2218.14 3631,2213.54 3631,2204.31 3620.64,2193.95 v1(3620.64,2193.64)
TXNRX: U1.V17 U5.H4 | length 1261.9
  Top Layer w5: v1@3599.61,2532.92 U1.V17@3615.09,2548.4 ; U5.H4@3635.99,2021.03 v1(3651.74,2005.28)
  Layer 1 w5: 3636.75,2020.25 v1(3651.74,2005.28)
  Bottom Layer w5: 3390,2140 3332,2198 3332,2593 3499,2760 3637,2760 3652,2775 3668,2775 3681,2762 3681,2749 3677,2745 3677,2711 3676.64,2710.64 3676.64,2680.64 3668.9,2672.9 3654.69,2672.9 3645.69,2663.9 3645.69,2650.61 3646,2650.3 3646,2616 3641,2611 3621,2611 3612,2602 3612,2585 3616,2581 3616,2551 3599.61,2534.61 v1(3599.61,2532.75) v1@3602.75,2532.75
UART_RX: P2.11 U1.C12
UART_TX: P2.12 U1.B12
USB2_5V: C137.1 J2.1 P2.15 R64.2 R66.1 R67.1
USB_ID: J2.4 U4.23
USB_OTG_N: J2.2 P2.16 U4.19
USB_OTG_P: J2.3 P2.17 U4.18
USB_VBUS: R66.2 U4.22
USR_BTN: R19.2 U1.C5 USR_BTN.2
USR_LED: Q2.1 R65.1 U1.C8
VCC1P8: C143.2 C144.2 CP2.1 CP3.2 LP1.2 RP2.1 U5.H12 X4.4 | length 32.1
  Top Layer w5: U5.H12@3635.99,2273 3635.99,2275.44 3644.99,2284.44 3644.99,2299.99 v1(3646,2301)
VCC_1V0: C2.2 C33.2 C34.2 C35.2 C36.2 C37.2 C39.2 C49.2 C50.2 C51.2 C52.2 C53.2 C54.2 C55.2 C56.2 C57.2 C67.2 L1.2 R7.1 R9.1 U1.G7 U1.G11 U1.G13 U1.H10 U1.H12 U1.J7 U1.J13 U1.K12 U1.L7 U1.L13 U1.M12 U1.N7 U1.N13 U1.P8 U1.P12 U1.R7 U1.R13 U6.14 | length 219.5
  Top Layer w12: v1@3693.57,2878.49 U1.R7@3709.05,2863.01 ; v1@3725.06,2846.99 U1.P8@3740.54,2831.51 ; v1@3756.56,2878.49 U1.N7@3772.04,2863.01
  Top Layer w14: v1(3691.77,2659.34) 3692.77,2659.34 3707.46,2674.03 U1.R13@3709.05,2674.03 ; v1@3725.23,2690.72 U1.P12@3740.04,2705.53 ; v1@3756.56,2658.55 U1.N13@3772.04,2674.03 ; U1.M12@3803.54,2705.53 v1@3819.02,2721.01 ; v1@3819.55,2658.55 U1.L13@3835.03,2674.03 ; U1.K12@3866.53,2705.53 v1@3882.01,2721.01 ; U1.J13@3898.02,2674.03 v1@3913.5,2689.51
  other v1: 3756.56,2657.54 3819.55,2657.54 3724.22,2690.72 3913.5,2690.52 3819.02,2722.02 3882.01,2722.02 3724.8,2846.99 3693.31,2878.49 3756.3,2878.49
VCC_1V5: C8.2 C38.2 C81.1 C86.2 C98.1 C99.1 C100.1 C101.1 C102.1 C103.1 C104.1 C105.1 C106.1 C107.1 C108.1 L3.2 R3.1 R4.2 R13.1 R14.1 U1.A3 U1.D2 U1.E5 U1.G1 U1.H4 U1.L3 U1.P2 U1.R5 U1.U1 U1.V4 U2.A1 U2.A8 U2.B2 U2.C1 U2.C9 U2.D2 U2.D9 U2.E9 U2.F1 U2.G7 U2.H2 U2.H9 U2.K2 U2.K8 U2.N1 U2.N9 U2.R1 U2.R9 U8.14 | length 225.8
  Top Layer w12: v1@3599.08,2972.97 U1.V4@3614.56,2957.49 ; v1@3630.58,3067.46 U1.U1@3646.06,3051.98 ; v1@3693.57,2941.48 U1.R5@3709.05,2926 ; U1.P2@3740.54,3020.49 v1@3756.01,3005.02 ; v1@3819.56,3004.46 U1.L3@3835.03,2988.99 ; v1@3914.05,2972.96 U1.H4@3929.52,2957.49 ; U1.G1@3961.02,3051.98 v1(3961,3078) ; U1.E5@4024.01,2926.26 v1@4039.49,2941.74 ; U1.D2@4055.5,3020.49 v1@4070.97,3035.96 ; U1.A3@4149.99,2988.99 4150.33,2989.33 4167.78,2989.33 4171.45,2993 v1(4173,2993)
  other v1: 3693.31,2941.48 4039.49,2942 3598.82,2972.97 3912,2973 3754,3004 3819.29,3004.46 4070.97,3036.23 3630.32,3067.46
VCC_1V8: C3.2 C41.2 C42.2 C43.2 C44.2 C45.2 C46.2 C68.2 C69.2 C70.2 C71.2 C72.2 C73.2 C74.2 C80.2 C82.2 C83.2 C84.2 C85.2 C90.2 C91.2 C92.2 C93.2 C94.2 C95.2 C96.2 C109.2 C110.2 C141.1 L2.2 R8.1 R10.1 R29.2 R30.1 R33.2 R34.1 R39.2 R41.2 R43.2 R45.2 R71.2 U1.A13 U1.B16 U1.C19 U1.D12 U1.E15 U1.F8 U1.F11 U1.F18 U1.G8 U1.G9 U1.H8 U1.H14 U1.J9 U1.J11 U1.J17 U1.K8 U1.K20 U1.L11 U1.M8 U1.M16 U1.N9 U1.N11 U1.N19 U1.P10 U1.R9 U1.R15 U1.T8 U1.T18 U1.U11 U1.V14 U1.W7 U1.W17 U1.Y10 U1.Y20 U3.15 U3.21 U4.8 U4.11 U4.14 U4.28 U4.30 U4.32 U7.14 USD1.5 | length 540.8
  Top Layer w8: U1.N19@3772.04,2485.05 3773.6,2485.05 3781.2,2477.45 3790.08,2477.45 3798.53,2469 3811,2469 3818.43,2461.57 3818.43,2445.43 3804,2431 ; 3802.64,2429.54 3842.51,2429.54 U1.K20@3866.53,2453.56
  Top Layer w12: v1@3536.09,2784 U1.Y10@3551.57,2768.52 ; v1@3567.58,2878.49 U1.W7@3583.06,2863.01 ; v1@3662.07,2846.99 U1.T8@3677.55,2831.51 ; v1@3693.57,2815.49 U1.R9@3709.05,2800.01 ; v1@3725.06,2784 U1.P10@3740.54,2768.52 ; v1@3756.56,2815.49 U1.N9@3772.04,2800.01 ; v1@3788.06,2846.99 U1.M8@3803.54,2831.51
  Top Layer w14: v1@3536.62,2438.61 U1.Y20@3552.1,2454.09 ; v1@3567.58,2532.57 U1.W17@3583.06,2548.05 ; v1@3599.08,2627.05 U1.V14@3614.56,2642.53 ; v1(3630.58,2721.36) 3630.58,2721.54 U1.U11@3646.06,2737.02 ; v1(3661.64,2501.42) 3662.42,2501.42 U1.T18@3678.08,2517.08 ; v1@3693.57,2595.56 U1.R15@3709.05,2611.04 ; v1(3756.56,2721.43) 3756.56,2721.55 U1.N11@3772.04,2737.02 ; v1(3788.23,2563.22) 3788.23,2564.23 U1.M16@3803.54,2579.54 ; U1.L11@3835.03,2737.02 v1@3850.51,2752.5 ; U1.J17@3898.02,2548.05 v1@3913.5,2563.53
  other v1: 3536.62,2438.43 3567.58,2531.56 3913.5,2564.54 3693.57,2594.55 3599.08,2626.04 3850.51,2753.51 3535.83,2784 3724.8,2784 3693.31,2815.49 3756.3,2815.49 3661.81,2846.99 3787.8,2846.99 3567.32,2878.49
VCC_3V3: *.8 C9.2 C20.2 C21.2 C25.2 C26.2 C61.2 C62.2 C75.2 C76.2 C77.2 C78.2 C87.2 C89.2 C113.2 C114.2 C115.2 C116.2 C120.1 C132.1 C133.1 C134.1 C138.1 C139.1 CP1.2 DONE.1 L4.2 LG1.14 P2.1 P2.6 R15.1 R16.1 R19.1 R27.2 R35.1 R38.1 R46.1 R47.1 R48.1 R55.1 R57.1 R59.2 R63.1 R68.2 tf1.4 U1.B6 U1.D7 U1.K6 U1.M6 U1.N6 U1.R6 U1.T6 U3.6 U3.37 U3.38 U3.41 U3.44 U3.45 U4.21 U9.14 U11.5 U11.7 U11.8 U12.5 U12.7 U12.8 U13.4 U14.8 UP1.1 UP1.4 USD1.17 USD1.21 USR_LED.1 X2.1 X2.4 | length 43.8
  Top Layer w12: v1@3662.07,2909.98 U1.T6@3677.55,2894.5 ; v1@3693.57,2909.98 U1.R6@3709.05,2894.5
  other v1: 3661.81,2909.98 3693.31,2909.98
VCC_IN: C4.2 C5.2 C10.2 C12.2 C140.2 P2.13 P2.14 TU1.5 U6.10 U6.11 U6.12 U6.13 U7.10 U7.11 U7.12 U8.10 U8.11 U8.12 U9.10 U9.11 U9.12
VDD_DIG: C14.1 C15.1 C22.2 C23.2 C24.2 C162.1 C172.1 C173.1 C176.1 C177.1 R22.1 RX4.2 U5.B8 U5.D2 U5.D3 U5.E3 U5.F12 U5.K4 U12.1 U12.2 | length 22.1
  Top Layer w12: v1(3557.36,2288.64) U5.F12@3573,2273
VDDA_RX_LO: C17.2 C18.2 C19.2 C165.1 C166.1 C168.1 C169.1 C170.1 C171.1 C174.1 C175.1 R21.1 U5.B9 U5.B10 U5.E2 U5.F2 U5.J3 U5.K3 U11.1 U11.2 | length 21.9
  Top Layer w12: v1@3431.51,2226.01 U5.B10@3447.02,2210.5
  other v1: 3431.51,2226.5
VUSB_V_EN: R69.1 TU1.4 U4.17
pads on no net: LG1. tf1.0 tf1.11 tf1.12 U1.A20 U1.B5 U1.B9 U1.B13 U1.B19 U1.B20 U1.C6 U1.C20 U1.D9 U1.D18 U1.D19 U1.D20 U1.E6 U1.E8 U1.E9 U1.E17 U1.E18 U1.E19 U1.F16 U1.F17 U1.F19 U1.F20 U1.G14 U1.G15 U1.G17 U1.G18 U1.G19 U1.G20 U1.H15 U1.H16 U1.H17 U1.H18 U1.H20 U1.J14 U1.J15 U1.J16 U1.J18 U1.J19 U1.J20 U1.K9 U1.K14 U1.K16 U1.K17 U1.K18 U1.K19 U1.L10 U1.L14 U1.L15 U1.L16 U1.L17 U1.L19 U1.L20 U1.M14 U1.M15 U1.M17 U1.M18 U1.M19 U1.M20 U1.N15 U1.N16 U1.P1 U1.P3 U1.R1 U1.R2 U1.R3 U1.T1 U1.T2 U1.T4 U1.T5 U1.T9 U1.U2 U1.U3 U1.U4 U1.U5 U1.U7 U1.U8 U1.U9 U1.U10 U1.V1 U1.V2 U1.V3 U1.V5 U1.V6 U1.V7 U1.V8 U1.V10 U1.V11 U1.W1 U1.W3 U1.W4 U1.W5 U1.W6 U1.W8 U1.W9 U1.W10 U1.W11 U1.W15 U1.Y1 U1.Y2 U1.Y3 U1.Y4 U1.Y6 U1.Y7 U1.Y8 U1.Y9 U1.Y11 U1.Y12 U1.Y13 U2.J1 U2.J9 U2.L1 U2.L9 U2.M7 U3.12 U3.46 U4.12 U4.15 U4.16 U5.A3 U5.B3 U5.B4 U5.B5 U5.B6 U5.B7 U5.C3 U5.L5 U5.M3 U5.M11 UP1.5 USD1.8 USD1.10 USD1.12 USD1.13 USD1.14 USD1.15 X4.1

## Text inside footprints (layer, text, board x,y; h text height)
DONE: Top Overlay "+" at 14102,4964.14 h30 r90
P2: Top Overlay "1" at 18685,3715 h30 r90; Top Overlay "13" at 18565,3675 h30 r90; Top Overlay "12" at 18665,4975 h30 r90; Top Overlay "24" at 18565,4975 h30 r90
RX1: Mechanical 37 "2" at 3378.35,1015.98 h30 r270; Mechanical 37 "3" at 3378.35,1015.98 h30 r270; Mechanical 37 "4" at 3037.83,1010.76 h30 r270; Mechanical 37 "5" at 3037.83,1010.76 h30 r270; Mechanical 37 "1" at 3208.83,1012.23 h30 r270; Mechanical 39 "200X95B" at 2804.83,901 h30 r270; Mechanical 39 "200X95" at 2864.83,917 h30 r270; Mechanical 39 "200X90" at 2924.83,917 h30 r270; Mechanical 39 "CNSMARAL687W375H171" at 3534.83,709 h30 r270; Top Component Outline "ADI/JRBL" at 3221.5,1093.47 h30; Top Component Outline "25JUL16" at 3221.5,1065.87 h30; Top Component Outline "QA/RGS" at 3221.5,298.26 h30; Top Component Outline "26JUL16" at 3221.5,245.86 h30; Mechanical 43 "PCB EDGE" at 2861.5,539 h30 r270; Top Assembly "UPN" at 3221.5,915.6 h30; Top Assembly "N/A" at 3221.5,955 h30
RX2: Mechanical 37 "2" at 6239.35,980.98 h30 r270; Mechanical 37 "3" at 6239.35,980.98 h30 r270; Mechanical 37 "4" at 5898.83,975.76 h30 r270; Mechanical 37 "5" at 5898.83,975.76 h30 r270; Mechanical 37 "1" at 6069.83,977.23 h30 r270; Mechanical 39 "200X95B" at 5665.83,866 h30 r270; Mechanical 39 "200X95" at 5725.83,882 h30 r270; Mechanical 39 "200X90" at 5785.83,882 h30 r270; Mechanical 39 "CNSMARAL687W375H171" at 6395.83,674 h30 r270; Top Component Outline "ADI/JRBL" at 6082.5,1058.47 h30; Top Component Outline "25JUL16" at 6082.5,1030.87 h30; Top Component Outline "QA/RGS" at 6082.5,263.26 h30; Top Component Outline "26JUL16" at 6082.5,210.86 h30; Mechanical 43 "PCB EDGE" at 5722.5,504 h30 r270; Top Assembly "UPN" at 6082.5,880.6 h30; Top Assembly "N/A" at 6082.5,920 h30
T1: Mechanical 37 "3" at 3098,1438.01 h30 r180; Mechanical 37 "6" at 3198,1563.01 h30 r180; Mechanical 37 "4" at 3098,1563.01 h30 r180; Mechanical 37 "1" at 3198,1438 h30 r180; Mechanical 37 "5" at 3148,1563 h30 r180; Mechanical 37 "2" at 3148.01,1438 h30 r180; Mechanical 39 "30X65" at 3148,1605.49 h30 r180; Mechanical 39 "TSML150W160H160" at 3148,1070.51 h30 r180; Top Component Outline "ADI/JSM" at 3348,1423.7 h30 r270; Top Component Outline "04SEP12" at 3298.01,1423.7 h30 r270; Top Component Outline "QA/REP" at 2973.01,1436.1 h30 r270; Top Component Outline "04SEP12" at 2923,1423.7 h30 r270; Top Assembly "N/A" at 3098,1480.5 h30 r270; Top Assembly "UPN" at 3073.01,1480.5 h30 r270
T2: Mechanical 37 "3" at 2406,1419.01 h30 r180; Mechanical 37 "6" at 2506,1544.01 h30 r180; Mechanical 37 "4" at 2406,1544.01 h30 r180; Mechanical 37 "1" at 2506,1419 h30 r180; Mechanical 37 "5" at 2456,1544 h30 r180; Mechanical 37 "2" at 2456.01,1419 h30 r180; Mechanical 39 "30X65" at 2456,1586.49 h30 r180; Mechanical 39 "TSML150W160H160" at 2456,1051.51 h30 r180; Top Component Outline "ADI/JSM" at 2656,1404.7 h30 r270; Top Component Outline "04SEP12" at 2606.01,1404.7 h30 r270; Top Component Outline "QA/REP" at 2281.01,1417.1 h30 r270; Top Component Outline "04SEP12" at 2231,1404.7 h30 r270; Top Assembly "N/A" at 2406,1461.5 h30 r270; Top Assembly "UPN" at 2381.01,1461.5 h30 r270
T3: Mechanical 37 "3" at 4697,1450.5 h30 r180; Mechanical 37 "6" at 4797,1575.5 h30 r180; Mechanical 37 "4" at 4697,1575.5 h30 r180; Mechanical 37 "1" at 4797,1450.49 h30 r180; Mechanical 37 "5" at 4747,1575.49 h30 r180; Mechanical 37 "2" at 4747.01,1450.49 h30 r180; Mechanical 39 "30X65" at 4747,1617.98 h30 r180; Mechanical 39 "TSML150W160H160" at 4747,1083 h30 r180; Top Component Outline "ADI/JSM" at 4947,1436.19 h30 r270; Top Component Outline "04SEP12" at 4897.01,1436.19 h30 r270; Top Component Outline "QA/REP" at 4572.01,1448.59 h30 r270; Top Component Outline "04SEP12" at 4522,1436.19 h30 r270; Top Assembly "N/A" at 4697,1492.99 h30 r270; Top Assembly "UPN" at 4672.01,1492.99 h30 r270
T4: Mechanical 37 "3" at 4013,1413.5 h30 r180; Mechanical 37 "6" at 4113,1538.5 h30 r180; Mechanical 37 "4" at 4013,1538.5 h30 r180; Mechanical 37 "1" at 4113,1413.49 h30 r180; Mechanical 37 "5" at 4063,1538.49 h30 r180; Mechanical 37 "2" at 4063.01,1413.49 h30 r180; Mechanical 39 "30X65" at 4063,1580.98 h30 r180; Mechanical 39 "TSML150W160H160" at 4063,1046 h30 r180; Top Component Outline "QA/REP" at 3888.01,1411.59 h30 r270; Top Component Outline "ADI/JSM" at 4263,1399.19 h30 r270; Top Component Outline "04SEP12" at 4213.01,1399.19 h30 r270; Top Component Outline "04SEP12" at 3838,1399.19 h30 r270; Top Assembly "N/A" at 4013,1455.99 h30 r270; Top Assembly "UPN" at 3988.01,1455.99 h30 r270
TX1: Mechanical 37 "2" at 4968.85,1015.48 h30 r270; Mechanical 37 "3" at 4968.85,1015.48 h30 r270; Mechanical 37 "4" at 4628.33,1010.26 h30 r270; Mechanical 37 "5" at 4628.33,1010.26 h30 r270; Mechanical 37 "1" at 4799.33,1011.73 h30 r270; Mechanical 39 "200X95B" at 4395.33,900.5 h30 r270; Mechanical 39 "200X95" at 4455.33,916.5 h30 r270; Mechanical 39 "200X90" at 4515.33,916.5 h30 r270; Mechanical 39 "CNSMARAL687W375H171" at 5125.33,708.5 h30 r270; Top Component Outline "ADI/JRBL" at 4812,1092.97 h30; Top Component Outline "25JUL16" at 4812,1065.37 h30; Top Component Outline "QA/RGS" at 4812,297.76 h30; Top Component Outline "26JUL16" at 4812,245.36 h30; Mechanical 43 "PCB EDGE" at 4452,538.5 h30 r270; Top Assembly "UPN" at 4812,915.1 h30; Top Assembly "N/A" at 4812,954.5 h30
TX2: Mechanical 37 "2" at 4188.35,1017.98 h30 r270; Mechanical 37 "3" at 4188.35,1017.98 h30 r270; Mechanical 37 "4" at 3847.83,1012.76 h30 r270; Mechanical 37 "5" at 3847.83,1012.76 h30 r270; Mechanical 37 "1" at 4018.83,1014.23 h30 r270; Mechanical 39 "200X95B" at 3614.83,903 h30 r270; Mechanical 39 "200X95" at 3674.83,919 h30 r270; Mechanical 39 "200X90" at 3734.83,919 h30 r270; Mechanical 39 "CNSMARAL687W375H171" at 4344.83,711 h30 r270; Top Component Outline "ADI/JRBL" at 4031.5,1095.47 h30; Top Component Outline "25JUL16" at 4031.5,1067.87 h30; Top Component Outline "QA/RGS" at 4031.5,300.26 h30; Top Component Outline "26JUL16" at 4031.5,247.86 h30; Mechanical 43 "PCB EDGE" at 3671.5,541 h30 r270; Top Assembly "UPN" at 4031.5,917.6 h30; Top Assembly "N/A" at 4031.5,957 h30
U5: Top Overlay "A" at 3405.03,1883.55 h30 r270; Top Overlay "1" at 3360.03,1913.55 h30
U6: Bottom Component Center "7" at 17206.9,5339.3 h30; Bottom Component Center "8" at 17206.9,5359 h30; Bottom Component Center "6" at 17206.9,5319.7 h30; Bottom Component Center "5" at 17206.9,5300 h30; Bottom Component Center "13" at 17099.5,5359 h30; Bottom Component Center "10" at 17167.4,5387.6 h30; Bottom Component Center "11" at 17147.8,5387.6 h30; Bottom Component Center "12" at 17128.1,5387.6 h30; Bottom Component Center "14" at 17099.5,5339.3 h30; Bottom Component Center "9" at 17178.3,5387.6 h30; Bottom Component Center "4" at 17178.3,5271.4 h30; Bottom Component Center "3" at 17158.6,5271.4 h30; Bottom Component Center "2" at 17139,5271.4 h30; Bottom Component Center "1" at 17119.3,5271.4 h30; Bottom Component Center "20" at 17157.6,5329.5 h30; Bottom Component Center "15" at 17099.5,5319.7 h30; Bottom Component Center "16" at 17099.5,5300 h30
U7: Bottom Component Center "7" at 17426.9,5339.3 h30; Bottom Component Center "8" at 17426.9,5359 h30; Bottom Component Center "6" at 17426.9,5319.7 h30; Bottom Component Center "5" at 17426.9,5300 h30; Bottom Component Center "13" at 17319.5,5359 h30; Bottom Component Center "10" at 17387.4,5387.6 h30; Bottom Component Center "11" at 17367.8,5387.6 h30; Bottom Component Center "12" at 17348.1,5387.6 h30; Bottom Component Center "14" at 17319.5,5339.3 h30; Bottom Component Center "9" at 17398.3,5387.6 h30; Bottom Component Center "4" at 17398.3,5271.4 h30; Bottom Component Center "3" at 17378.6,5271.4 h30; Bottom Component Center "2" at 17359,5271.4 h30; Bottom Component Center "1" at 17339.3,5271.4 h30; Bottom Component Center "20" at 17377.6,5329.5 h30; Bottom Component Center "15" at 17319.5,5319.7 h30; Bottom Component Center "16" at 17319.5,5300 h30
U8: Bottom Component Center "7" at 14366.9,5339.3 h30; Bottom Component Center "8" at 14366.9,5359 h30; Bottom Component Center "6" at 14366.9,5319.7 h30; Bottom Component Center "5" at 14366.9,5300 h30; Bottom Component Center "13" at 14259.5,5359 h30; Bottom Component Center "10" at 14327.4,5387.6 h30; Bottom Component Center "11" at 14307.8,5387.6 h30; Bottom Component Center "12" at 14288.1,5387.6 h30; Bottom Component Center "14" at 14259.5,5339.3 h30; Bottom Component Center "9" at 14338.3,5387.6 h30; Bottom Component Center "4" at 14338.3,5271.4 h30; Bottom Component Center "3" at 14318.6,5271.4 h30; Bottom Component Center "2" at 14299,5271.4 h30; Bottom Component Center "1" at 14279.3,5271.4 h30; Bottom Component Center "20" at 14317.6,5329.5 h30; Bottom Component Center "15" at 14259.5,5319.7 h30; Bottom Component Center "16" at 14259.5,5300 h30
U9: Bottom Component Center "7" at 13976.9,5339.3 h30; Bottom Component Center "8" at 13976.9,5359 h30; Bottom Component Center "6" at 13976.9,5319.7 h30; Bottom Component Center "5" at 13976.9,5300 h30; Bottom Component Center "13" at 13869.5,5359 h30; Bottom Component Center "10" at 13937.4,5387.6 h30; Bottom Component Center "11" at 13917.8,5387.6 h30; Bottom Component Center "12" at 13898.1,5387.6 h30; Bottom Component Center "14" at 13869.5,5339.3 h30; Bottom Component Center "9" at 13948.3,5387.6 h30; Bottom Component Center "4" at 13948.3,5271.4 h30; Bottom Component Center "3" at 13928.6,5271.4 h30; Bottom Component Center "2" at 13909,5271.4 h30; Bottom Component Center "1" at 13889.3,5271.4 h30; Bottom Component Center "20" at 13927.6,5329.5 h30; Bottom Component Center "15" at 13869.5,5319.7 h30; Bottom Component Center "16" at 13869.5,5300 h30
U13: Bottom Component Center "2" at 7499,2547.5 h30; Bottom Component Center "1" at 7424,2547.5 h30; Bottom Component Center "4" at 7424,2630.1 h30; Bottom Component Center "3" at 7499,2630.1 h30
U14: Bottom Component Center "5" at 15835,5044.95 h30 r90; Bottom Component Center "2" at 15735,4729.95 h30 r90; Bottom Component Center "1" at 15685,4729.95 h30 r90; Bottom Component Center "4" at 15835,4729.95 h30 r90; Bottom Component Center "8" at 15685,5044.95 h30 r90; Bottom Component Center "7" at 15735,5044.95 h30 r90; Bottom Component Center "3" at 15785,4729.95 h30 r90; Bottom Component Center "6" at 15785,5044.95 h30 r90
USR_LED: Top Overlay "+" at 14392,4954.14 h30 r90